# EAGLE board Terrific Wluff (EAGLE 7.6.0)

Size 73.58 x 63.39 mm. Coordinates in mm from the lower left corner, seen from the top.
Outline: 0,0 56.82,0 56.82,53.33 0,53.33 0,0
Copper layers (1*16): Top 0.035mm / dielectric 1.5mm / Bottom 0.035mm
Design rules "default": minimum track width 10mil, minimum drill 24mil, track to track 8mil, track to pad 8mil, pad to pad 8mil, via to via 8mil, smd to smd 8mil, copper to edge 40mil, drill to drill 8mil, minimum pad ring 10mil, minimum via ring 8mil, stop-mask expansion 4mil, vias tented up to drill 0mil, thermal gap 10mil

## Footprints (pad centres in the part's own frame; a part is rotated, then mirrored left to right if it is on the bottom)
LED5MM = drill 0.813 octagon: A -1.27,0; K 1.27,0
0207/10 = drill 0.813 octagon: 1 -5.08,0; 2 5.08,0
ARDUINO_UNO = drill 1.016 pad 1.88: 0 63.5,50.8; 1 60.96,50.8; 2 58.42,50.8; 3 55.88,50.8; 3.3V 35.56,2.54; 4 53.34,50.8; 5 50.8,50.8; 5V 38.1,2.54; 6 48.26,50.8; 7 45.72,50.8; 8 41.656,50.8; 9 39.116,50.8; 10 36.576,50.8; 11 34.036,50.8; 12 31.496,50.8; 13 28.956,50.8; A0 50.8,2.54; A1 53.34,2.54; A2 55.88,2.54; A3 58.42,2.54; A4 60.96,2.54; A5 63.5,2.54; AREF 23.876,50.8; GND 26.416,50.8; GND. 43.18,2.54; GND.. 40.64,2.54; I/OREF 30.48,2.54; N/C 27.94,2.54; RESET 33.02,2.54; SCL 18.796,50.8; SDA 21.336,50.8; VIN 45.72,2.54 | hole 3.2: 66.04,7.62; 66.04,35.56; 15.24,50.8; 13.97,2.54

## Placement (x,y rotation side)
Dgl1  [LED5MM]  5,264.08 0 top  (outside the outline)
Dgl2  [LED5MM]  5,73.58 0 top  (outside the outline)
Dgl3  [LED5MM]  5,111.68 0 top  (outside the outline)
Dgl4  [LED5MM]  5,225.98 0 top  (outside the outline)
Drl1  [LED5MM]  5,238.68 0 top  (outside the outline)
Drl2  [LED5MM]  5,22.78 0 top
Drl3  [LED5MM]  5,314.88 0 top  (outside the outline)
Drl4  [LED5MM]  5,200.58 0 top  (outside the outline)
Dyl1  [LED5MM]  5,251.38 0 top  (outside the outline)
Dyl2  [LED5MM]  5,35.48 0 top
Dyl3  [LED5MM]  5,98.98 0 top  (outside the outline)
Dyl4  [LED5MM]  5,213.28 0 top  (outside the outline)
Rgr1  220‎Ω  [0207/10]  5,302.18 0 top  (outside the outline)
Rgr2  220‎Ω  [0207/10]  5,86.28 0 top  (outside the outline)
Rgr3  220‎Ω  [0207/10]  5,149.78 0 top  (outside the outline)
Rgr4  220‎Ω  [0207/10]  5,187.88 0 top  (outside the outline)
Rrr1  220‎Ω  [0207/10]  5,276.78 0 top  (outside the outline)
Rrr2  220‎Ω  [0207/10]  5,48.18 0 top
Rrr3  220‎Ω  [0207/10]  5,124.38 0 top  (outside the outline)
Rrr4  220‎Ω  [0207/10]  5,162.48 0 top  (outside the outline)
Ryr1  220‎Ω  [0207/10]  5,289.48 0 top  (outside the outline)
Ryr2  220‎Ω  [0207/10]  5,60.88 0 top
Ryr3  220‎Ω  [0207/10]  5,137.08 0 top  (outside the outline)
Ryr4  220‎Ω  [0207/10]  5,175.18 0 top  (outside the outline)
U1  [ARDUINO_UNO]  5,10.08 0 top

## Library data of the parts
Dgl1-Dgl4 Drl1-Drl4 Dyl1-Dyl4 Rgr1-Rgr4 Rrr1-Rrr4 Ryr1-Ryr4 U1 = AUTODESK_CIRCUITS_BREADBOARD

## Nets
N$1: Drl2.A Rrr2.1 Rrr2.2 U1.2
N$2: Dgl2.K Drl2.K Dyl2.K U1.GND.
N$3: Dyl2.A Ryr2.1 Ryr2.2 U1.3
N$4: Dgl2.A Rgr2.1 Rgr2.2 U1.4
N$5: Dyl3.A Ryr3.1
N$6: Dgl3.A Rrr3.1
N$7: Rgr3.2 U1.8
N$8: Dgl1.K Dgl4.K Drl1.K Drl4.K Dyl1.K Dyl4.K U1.GND
N$9: Drl4.A Rrr4.1 Rrr4.2 U1.11
N$10: Dyl4.A Ryr4.1 Ryr4.2 U1.12
N$11: Dgl4.A Rgr4.1 Rgr4.2 U1.13
N$12: Drl1.A Rrr1.1 Rrr1.2 U1.5
N$13: Dgl1.A Rgr1.2
N$14: Rgr1.1 U1.7
N$15: Dyl1.A Ryr1.2
N$16: Ryr1.1 U1.6
N$17: Ryr3.2 U1.9
N$18: Rrr3.2 U1.10
N$19: Dgl3.K Drl3.K Dyl3.K U1.GND..
N$20: Drl3.A Rgr3.1

## Tracks (layer width: path | path; a pad name or v marks a point on that pad's centre or on a via)
N$1  (3 unrouted)
N$2  (3 unrouted)
N$3  (3 unrouted)
N$4  (3 unrouted)
N$5  (1 unrouted)
N$6  (1 unrouted)
N$7  (1 unrouted)
N$8  (6 unrouted)
N$9  (3 unrouted)
N$10  (3 unrouted)
N$11  (3 unrouted)
N$12  (3 unrouted)
N$13  (1 unrouted)
N$14  (1 unrouted)
N$15  (1 unrouted)
N$16  (1 unrouted)
N$17  (1 unrouted)
N$18  (1 unrouted)
N$19  (3 unrouted)
N$20  (1 unrouted)